# EAGLE board o (EAGLE 7.1.0)
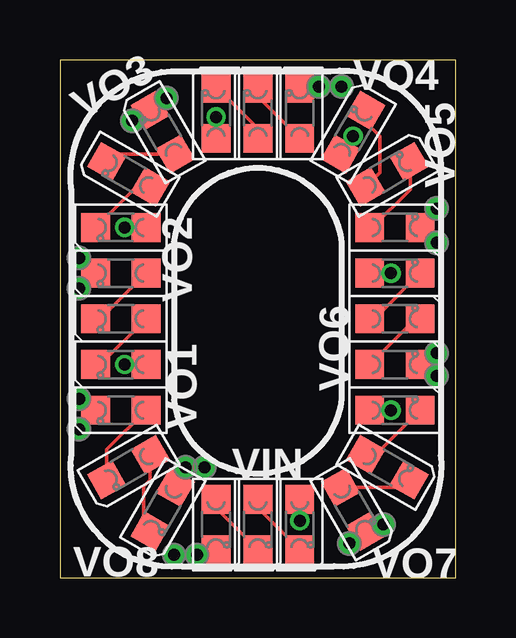
[diagram p0: board, top side]
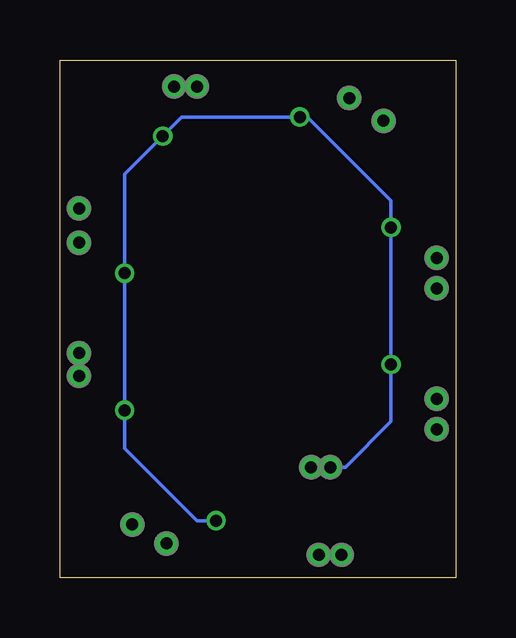
[diagram p1: board, bottom side, seen from below]

Size 16.51 x 21.59 mm. Coordinates in mm from the lower left corner, seen from the top.
Outline: 0,0 16.51,0 16.51,21.59 0,21.59 0,0
Copper layers (1*16): Top 0.035mm / dielectric 1.5mm / Bottom 0.035mm
Design rules "Fusion_eagle_rule_v1.1_tms *": minimum track width 6mil, minimum drill 12mil, track to track 6mil, track to pad 6mil, pad to pad 6mil, via to via 6mil, smd to smd 0mil, copper to edge 10mil, drill to drill 10mil, minimum pad ring 10mil, minimum via ring 6mil, stop-mask expansion 2mil, vias tented up to drill 100mil, thermal gap 10mil

## Footprints (pad centres in the part's own frame; a part is rotated, then mirrored left to right if it is on the bottom)
LED_0805 = smd 1.2 x 1.2: A 0,-1.05; C 0,1.05
P1-20 = drill 0.5: TP 0,0

## Placement (x,y rotation side)
LED1  [LED_0805]  4.29,2.86 150 top
LED2  [LED_0805]  2.86,4.6 120 top
LED3  [LED_0805]  2.54,6.99 90 top
LED4  [LED_0805]  2.54,8.89 90 top
LED5  [LED_0805]  2.54,10.79 90 top
LED6  [LED_0805]  2.54,12.7 90 top
LED7  [LED_0805]  2.54,14.61 90 top
LED8  [LED_0805]  2.86,16.83 60 top
LED9  [LED_0805]  4.29,18.57 30 top
LED10  [LED_0805]  6.51,19.37 0 top
LED11  [LED_0805]  8.26,19.37 0 top
LED12  [LED_0805]  10,19.37 0 top
LED13  [LED_0805]  12.22,18.57 330 top
LED14  [LED_0805]  13.65,16.83 300 top
LED15  [LED_0805]  13.97,14.61 270 top
LED16  [LED_0805]  13.97,12.7 270 top
LED17  [LED_0805]  13.97,10.79 270 top
LED18  [LED_0805]  13.97,8.89 270 top
LED19  [LED_0805]  13.97,6.99 270 top
LED20  [LED_0805]  13.65,4.6 240 top
LED21  [LED_0805]  12.22,2.86 210 top
LED22  [LED_0805]  10,2.22 180 top
LED23  [LED_0805]  8.26,2.22 180 top
LED24  [LED_0805]  6.51,2.22 180 top
VIN  [P1-20]  5.24,4.6 0 top
VIN1  [P1-20]  6.03,4.6 0 top
VO1  [P1-20]  0.79,7.46 0 top
VO2  [P1-20]  0.79,12.06 0 top
VO3  [P1-20]  3.02,19.05 0 top
VO4  [P1-20]  11.75,20.48 0 top
VO5  [P1-20]  15.72,15.4 0 top
VO6  [P1-20]  15.72,8.41 0 top
VO7  [P1-20]  13.49,2.22 0 top
VO8  [P1-20]  5.71,0.95 0 top
VO9  [P1-20]  0.79,6.19 0 top
VO10  [P1-20]  0.79,13.34 0 top
VO11  [P1-20]  4.45,20 0 top
VO12  [P1-20]  10.79,20.48 0 top
VO13  [P1-20]  15.72,13.97 0 top
VO14  [P1-20]  15.72,9.37 0 top
VO15  [P1-20]  12.06,1.43 0 top
VO16  [P1-20]  4.76,0.95 0 top

## Library data of the parts
LED1-LED24 VIN VIN1 VO1-VO16 = CyberRailGuru

## Nets
N$1: LED22.C LED23.A
N$2: LED23.C LED24.A
N$3: LED2.C LED3.A
N$4: LED1.C LED2.A
N$5: LED24.C VO8.TP VO16.TP
N$7: LED5.C LED6.A
N$8: LED4.C LED5.A
N$11: LED8.C LED9.A
N$12: LED7.C LED8.A
N$15: LED11.C LED12.A
N$16: LED10.C LED11.A
N$19: LED14.C LED15.A
N$20: LED13.C LED14.A
N$23: LED17.C LED18.A
N$24: LED16.C LED17.A
N$27: LED20.C LED21.A
N$28: LED19.C LED20.A
VIN: LED1.A LED4.A LED7.A LED10.A LED13.A LED16.A LED19.A LED22.A VIN1.TP VIN.TP
VOUT1: LED3.C VO1.TP VO9.TP
VOUT2: LED6.C VO2.TP VO10.TP
VOUT3: LED9.C VO3.TP VO11.TP
VOUT4: LED12.C VO4.TP VO12.TP
VOUT5: LED15.C VO5.TP VO13.TP
VOUT6: LED18.C VO6.TP VO14.TP
VOUT7: LED21.C VO7.TP VO15.TP

## Tracks (layer width: path | path; a pad name or v marks a point on that pad's centre or on a via)
N$1
  Top 0.152: LED23.A 8.26,2.92 LED22.C
N$2
  Top 0.152: LED24.A 6.51,2.92 LED23.C
N$3
  Top 0.152: LED2.C 1.95,5.34 LED3.A
N$4
  Top 0.152: LED2.A 3.77,4.08 3.49,3.81 3.49,2.22 LED1.C
N$5
  Top 0.152: LED24.C 5.93,1.17 VO8.TP VO16.TP
N$7
  Top 0.152: LED5.C 1.69,10.79 LED6.A
N$8
  Top 0.152: LED4.C 1.69,8.89 LED5.A
N$11
  Top 0.152: LED9.A 2.26,17.66 LED8.C
N$12
  Top 0.152: LED8.A 3.19,16.3 LED7.C
N$15
  Top 0.152: LED11.C 8.26,20.06 LED12.A
N$16
  Top 0.152: LED10.C 6.51,20.06 6.92,20.06 8.26,18.73 LED11.A
N$19
  Top 0.152: LED15.A 13.02,14.61 14.61,16.19 14.61,17.31 LED14.C
N$20
  Top 0.152: LED13.C 12.75,19 13.34,18.41 13.34,16.89 LED14.A
N$23
  Top 0.152: LED17.C 14.82,10.79 LED18.A
N$24
  Top 0.152: LED17.A 13.12,10.79 LED16.C
N$27
  Top 0.152: LED21.A 14.25,3.77 LED20.C
N$28
  Top 0.152: LED20.A 13.16,5.13 LED19.C
VIN  (via drill 0.5)
  Top 0.152: LED1.A 5.24,4.19 VIN.TP VIN1.TP | v2.7,8.89 LED4.A | LED7.A v2.7,14.61 | LED10.A v6.51,19.21 | LED13.A 11.7,17.89 v12.22,18.41 | LED16.A v13.81,12.7 | LED19.A v13.81,6.99 | LED22.A v10,2.38
  Bottom 0.152: VIN.TP 4.6,4.6 2.7,6.51 v2.7,8.89 v2.7,14.61 2.7,15.72 6.19,19.21 v6.51,19.21 11.43,19.21 v12.22,18.41 13.81,16.83 v13.81,12.7 v13.81,6.99 13.81,5.4 10.79,2.38 v10,2.38
VOUT1
  Top 0.152: VO1.TP 1.01,7.46 LED3.C 0.79,6.29 VO9.TP
VOUT2
  Top 0.152: VO10.TP 0.85,13.34 LED6.C 0.85,12.06 VO2.TP
VOUT3
  Top 0.152: VO11.TP 4.28,20 LED9.C 3.33,19.05 VO3.TP
VOUT4
  Top 0.152: LED12.C 10.06,20.48 VO12.TP VO4.TP
VOUT5
  Top 0.152: VO13.TP 15.65,13.97 LED15.C 15.72,15.3 VO5.TP
VOUT6
  Top 0.152: VO6.TP 15.5,8.41 LED18.C 15.5,9.37 VO14.TP
VOUT7
  Top 0.152: VO15.TP 12.23,1.43 LED21.C 13.02,2.22 VO7.TP

## Text on the board
201bmp: O